# Altium PCB 球锁蓝牙20818.PcbDoc (part 1 of 3)
Units mm, origin at the board's own origin, x right, y up, seen from the top; angles counter-clockwise.
Board outline 49.43 x 48.4 mm, 2 copper layers (Top Layer, Bottom Layer); 90 components, 56 nets, 267 pads, 205 vias.
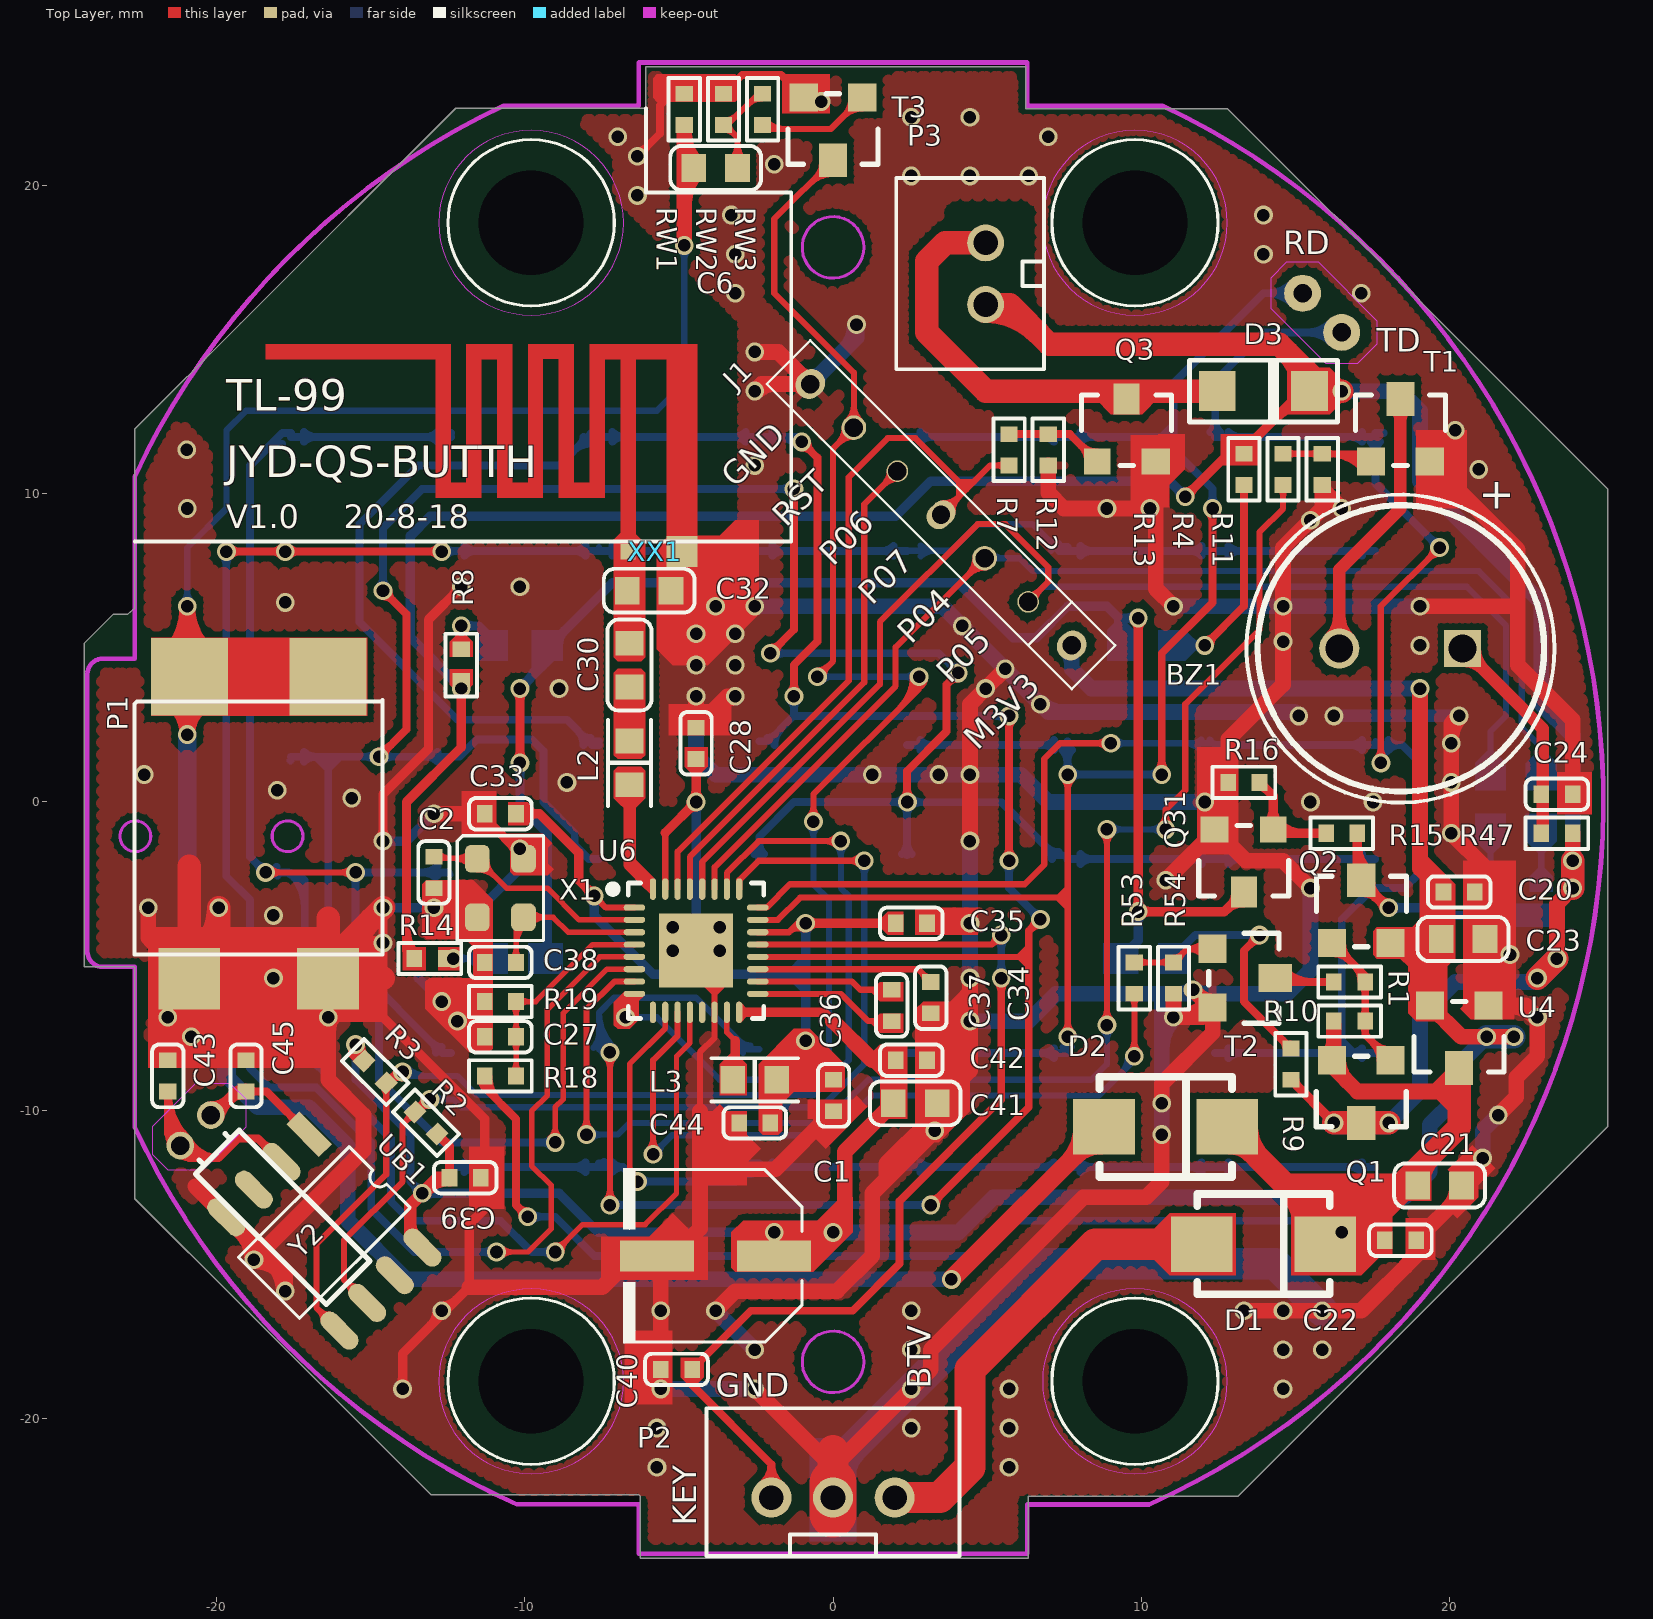
[diagram p0: Top Layer view]
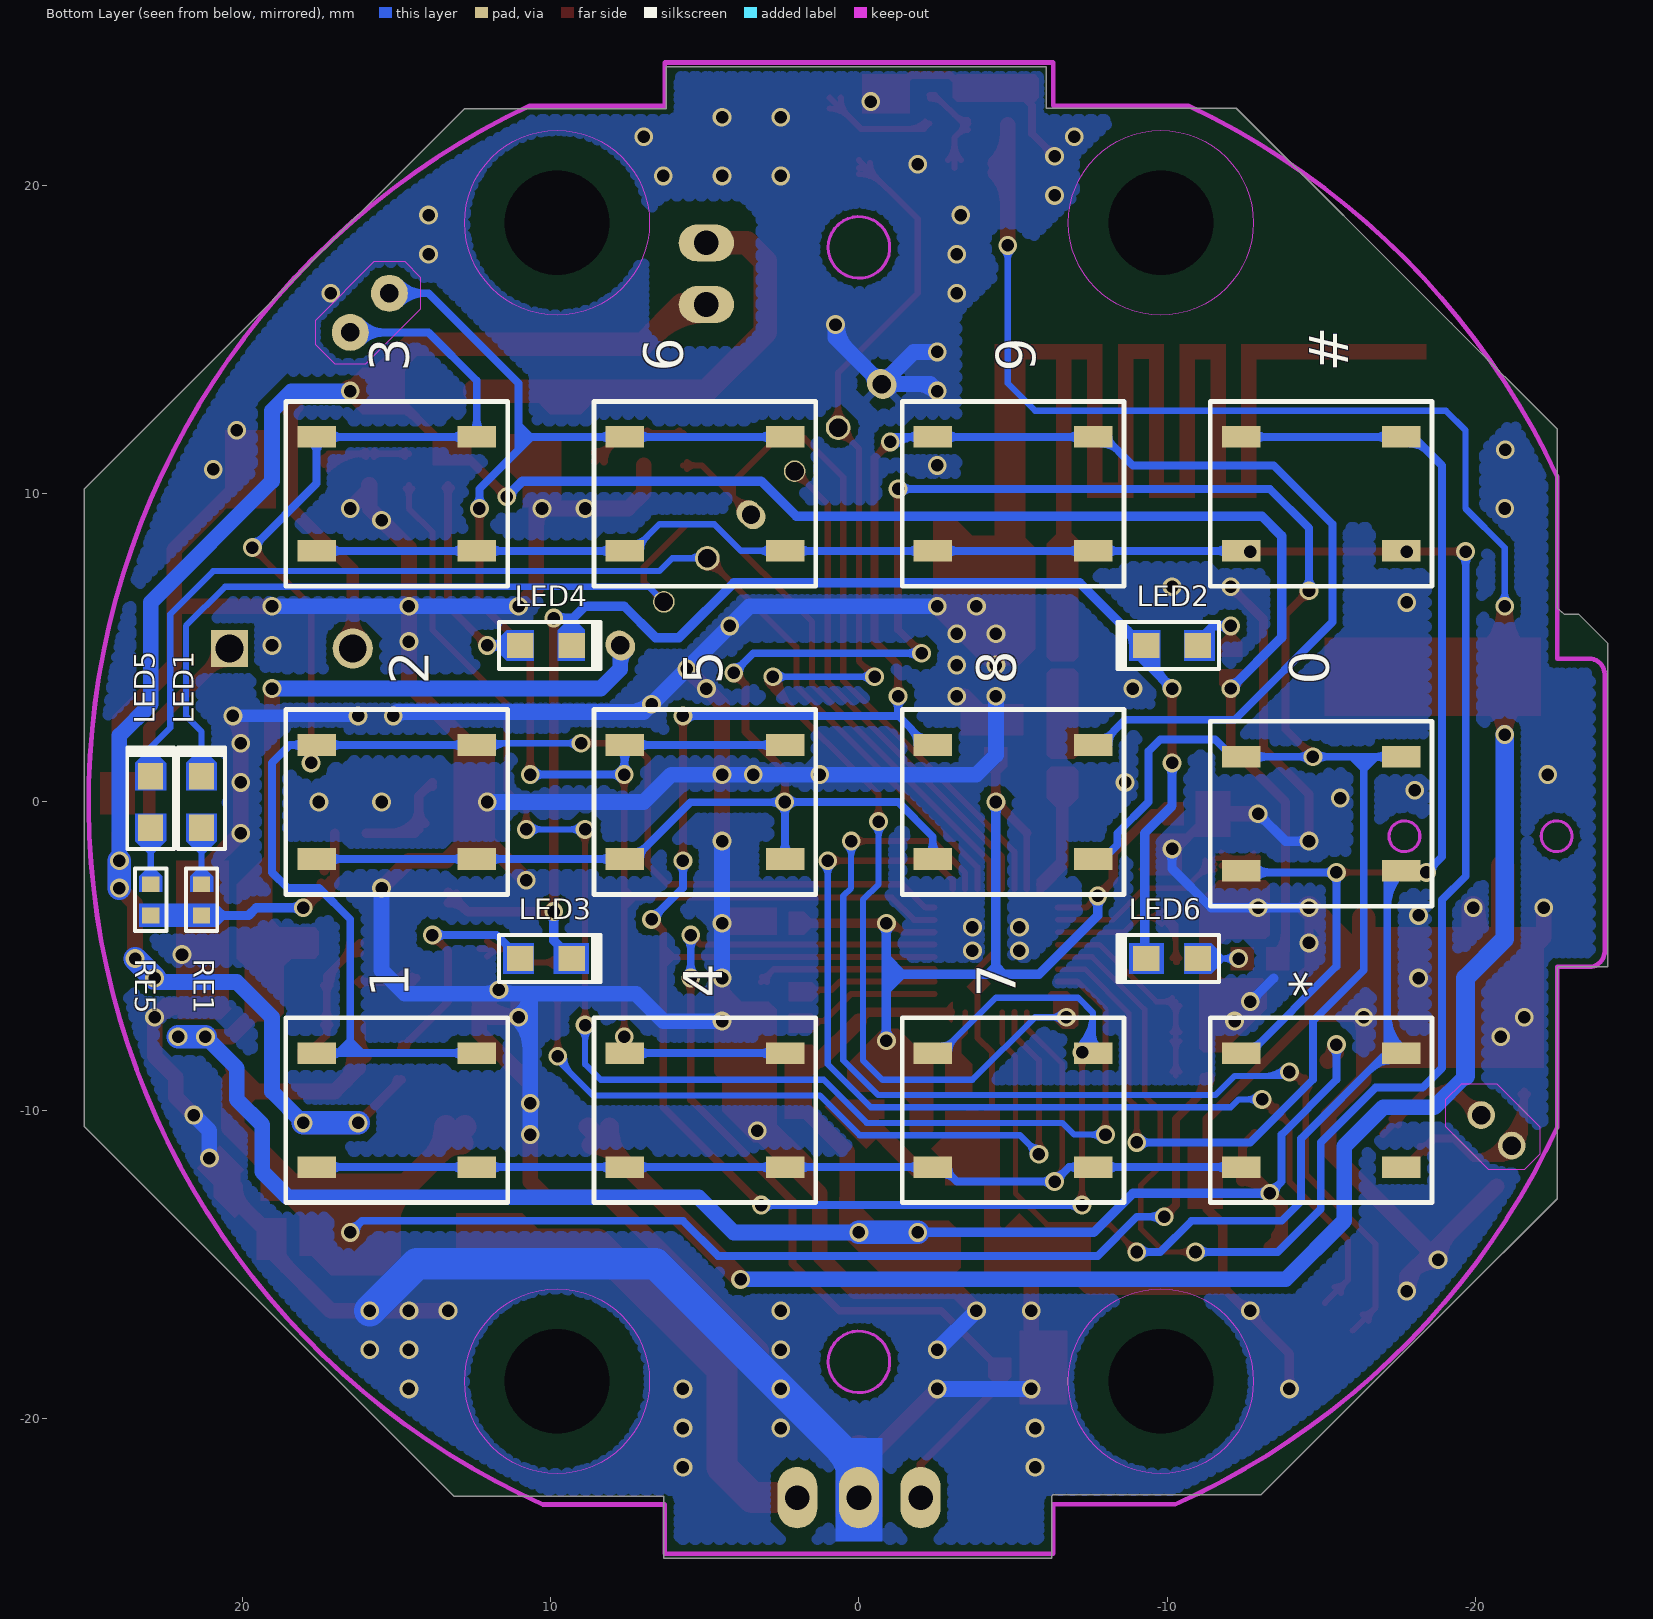
[diagram p1: Bottom Layer view, seen from below]
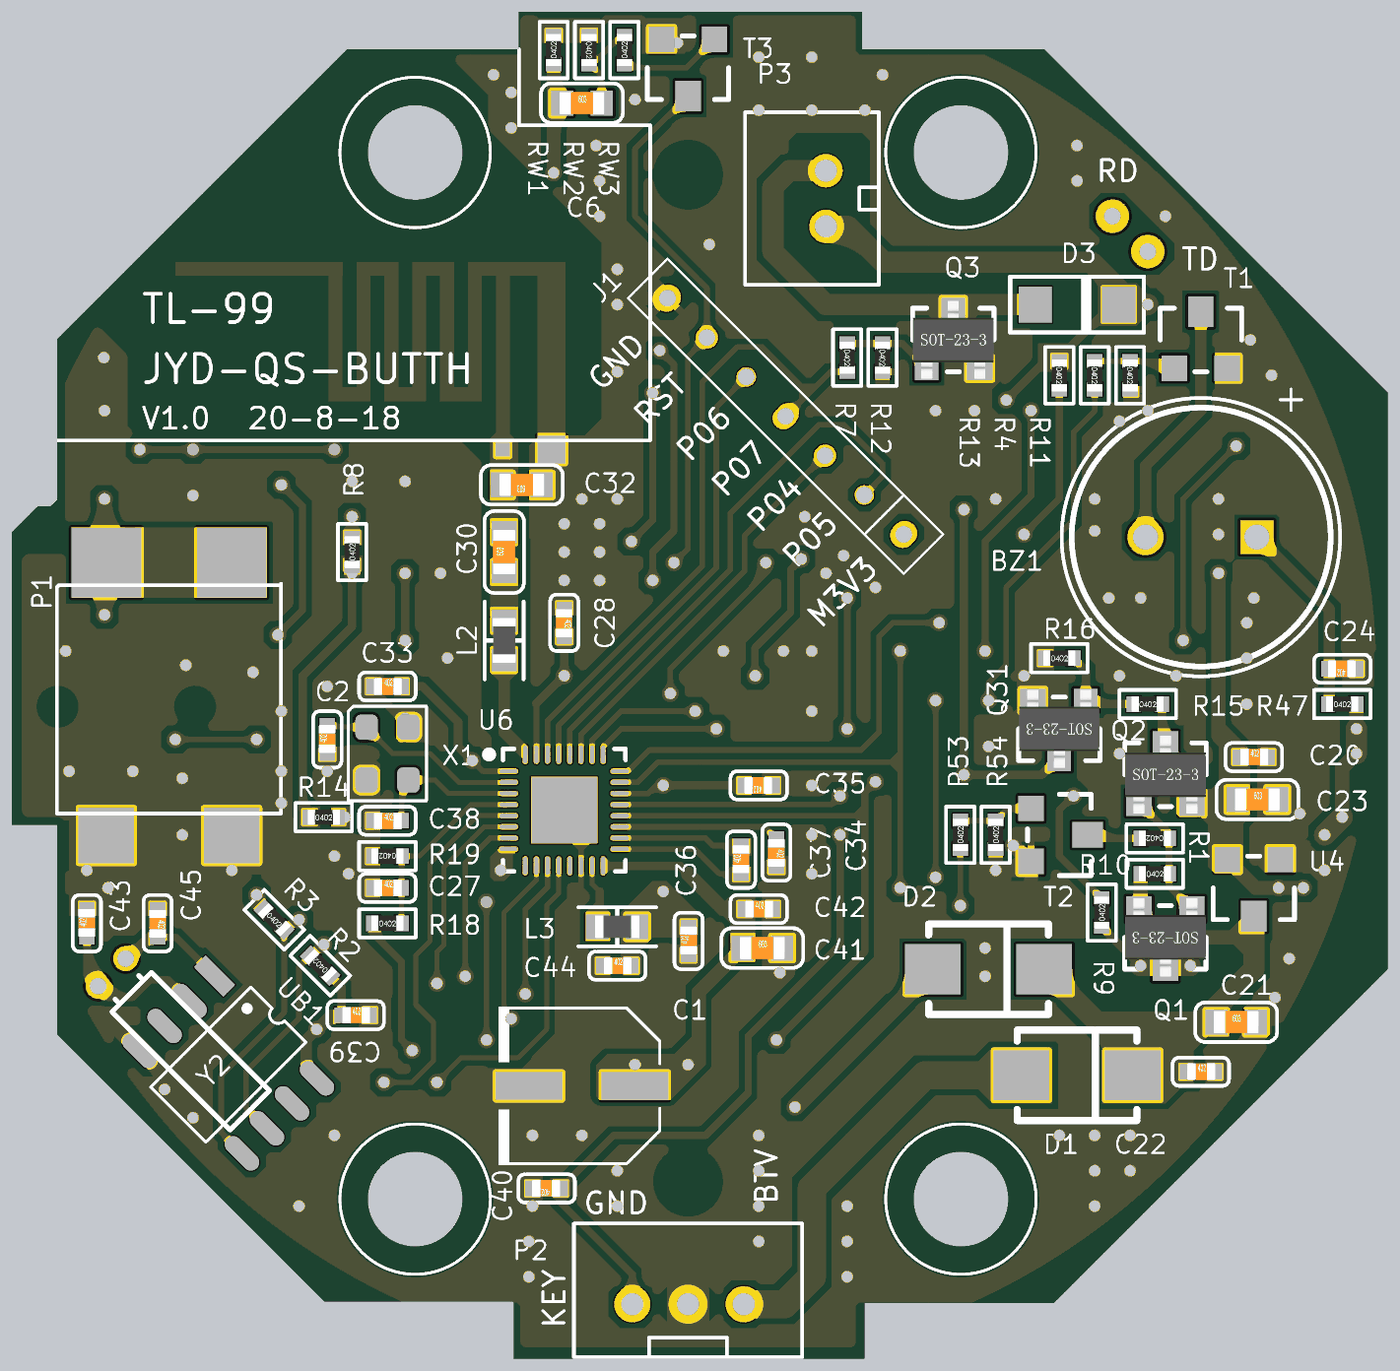
[diagram p4: 3D render of the assembled board from above, using the file's embedded part models]

## Layer stack, top to bottom
Top Layer: signal copper 0.0356
Dielectric: core 0.32, FR-4, Dk 4.8
Bottom Layer: signal copper 0.0356

## Board outline
-22.659,6.304 -22.659,9.913 -22.659,12.103 -19.23,15.531 -12.246,22.515 -10.41,22.515 -6.073,22.515 -6.073,23.86 6.247,23.86 6.247,22.504 10.214,22.504 12.796,22.504 19.37,15.931 25.135,10.165 25.135,-2.281 25.135,-10.54 17.24,-18.436 13.136,-22.54 6.337,-22.54 6.337,-24.54 -6.056,-24.54 -6.253,-24.54 -6.253,-22.53 -6.306,-22.477 -11.548,-22.477 -13.056,-22.477 -19.133,-16.4 -22.659,-12.874 -22.659,-10.79 -22.659,-5.369 -22.674,-5.354 -24.293,-5.354 -24.293,5.158 -23.644,5.807 -23.364,6.087 -22.896,6.087

## Design rules (kind name [scope] priority, off if disabled: settings)
Clearance Clearance_1 [(InPoly)Or(IsKeepOut) vs (InPoly)Or(IsKeepOut)] p1 off: gap=0.305
Clearance [All] p2: gap=0.2
ComponentClearance [All] p1: gap=0 collisioncheckmode=3 verticalgap=0 showdistances=FALSE
FabricationTestPointUsage TestPointUsage [All] p1: valid=0 allowmultiple=FALSE
FabricationTestpoint Testpoint [(IsPad And (OnTopLayer Or OnBottomLayer))] p1: side=3 testpointundercomponent=TRUE minsize=1.016 maxsize=2.54 preferedsize=1.524 minholesize=0 maxholesize=1.016 preferedholesize=0.813 testpointgrid=0.025 allowsidetop=TRUE allowsidebottom=TRUE usegrid=TRUE gridtolerance=0
HoleSize [All] p1: absolutevalues=TRUE maxlimit=25.4 minlimit=0.025 maxpercent=80.000 minpercent=20.000
HoleToHoleClearance [All] p1: gap=0 allowstackedmicrovias=TRUE
MinimumSolderMaskSliver [All] p1: minsoldermaskwidth=0
PolygonConnect PolygonConnect_1 [IsVia] p1: connectstyle=Direct reliefconductorwidth=0.254 reliefentries=4 polygonreliefangle="90 Angle" airgapwidth=0.254
PolygonConnect [All] p2: connectstyle=Relief reliefconductorwidth=0.254 reliefentries=4 polygonreliefangle="90 Angle" airgapwidth=0.254
RoutingVias [All] p1: holewidth=0.4 width=0.6 viastyle="Through Hole" minholewidth=0.4 minwidth=0.6 maxholewidth=0.4 maxwidth=0.6
SilkToSilkClearance [All] p1: silktosilkclearance=0
SilkToSolderMaskClearance SilkscreenOverComponentPads [IsPad] p1: minsilkscreentomaskgap=0 clearancetoexposedcopper=TRUE
SolderMaskExpansion [All] p1: expansion=0.102
Width [All] p1: maxlimit=2.032 minlimit=0.152 preferedwidth=0.254
20 further rules are at their usual default settings.

## Components (designator, comment, footprint, x,y, rotation, side; value= is the part's Value field where it differs from the comment)
0 "SW" KEY_5.2*3.7*6.4 -15,-0.381 r180 bottom
1 "SW" KEY_5.2*3.7*6.4 15,-10 r0 bottom
2 "SW" KEY_5.2*3.7*6.4 15,0 r0 bottom
3 "SW" KEY_5.2*3.7*6.4 15,10 r0 bottom
4 "SW" KEY_5.2*3.7*6.4 5,-10 r0 bottom
5 "SW" KEY_5.2*3.7*6.4 5,0 r0 bottom
6 "SW" KEY_5.2*3.7*6.4 5,10 r0 bottom
7 "SW" KEY_5.2*3.7*6.4 -5,-10 r0 bottom
8 "SW" KEY_5.2*3.7*6.4 -5,0 r0 bottom
9 "SW" KEY_5.2*3.7*6.4 -5,10 r0 bottom
# "SW" KEY_5.2*3.7*6.4 -15,10 r0 bottom
* "SW" KEY_5.2*3.7*6.4 -15,-10 r0 bottom
BZ1 "BUZZER" BUZZER_D93_L40 18.43,4.984 r180 top locked
C1 "220uF/6.3V" R5*5.8 -3.81,-14.732 r180 top
C2 "12pF" 0402C -12.954,-2.286 r90 top
C6 "10uF/10V" 0603C -3.81,20.574 r0 top (schematic designator C?)
C20 "0.1uF" 0402C 20.32,-2.921 r0 top
C21 "22uF/10V" 0603C 19.685,-12.446 r0 top
C22 "0.1uF" 0402C 18.415,-14.224 r0 top
C23 "10uF/10V" 0603C 20.447,-4.445 r0 top
C24 "10uF/10V" 0402C 23.495,0.254 r180 top
C27 "1nF" 0402C -10.795,-7.62 r0 top
C28 "1uF/6.3V" 0402C -4.445,1.905 r270 top
C30 "1.5pF" 0603C -6.604,4.445 r90 top
C32 "1pF" 0603C -5.969,6.858 r180 top
C33 "0.1uF" 0402C -10.795,-0.381 r0 top
C34 "0.1uF" 0402C 3.175,-6.35 r270 top
C35 "1uF" 0402C 2.54,-3.937 r180 top
C36 "0.1uF" 0402C 0.019,-9.525 r90 top
C37 "0.1uF" 0402C 1.905,-6.604 r90 top
C38 "12pF" 0402C -10.795,-5.207 r0 top
C39 "0.1uF" 0402C -11.938,-12.192 r0 top
C40 "1nF" 0402C -5.08,-18.415 r180 top
C41 "10uF/6.3V" 0603C 2.667,-9.779 r0 top
C42 "0.1uF" 0402C 2.54,-8.382 r0 top
C43 "22PF" 0402C -21.59,-8.89 r90 top (schematic designator C26)
C44 "10uF/6.3V" 0402C -2.54,-10.414 r0 top
C45 "22PF" 0402C -19.05,-8.89 r270 top (schematic designator C28)
D1 "SS14" DO-214AA 13.97,-14.351 r180 top
D2 "SS14" DO-214AA 10.795,-10.541 r180 top
D3 "IN4148" SOD-123 13.97,13.335 r0 top
J1 "7P" 7P-2.0MM 7.747,5.08 r135 top
L2 "2nH" 0603L -6.604,1.27 r270 top
L3 "2.2uH" 0603L -2.54,-9.017 r180 top
LED1 "GREEN" 0603LED 21.336,0 r90 bottom
LED2 "Blue" 0603LED -10.16,5.08 r0 bottom
LED3 "Blue" 0603LED 10.16,-5.08 r180 bottom
LED4 "Blue" 0603LED 10.16,5.08 r180 bottom
LED5 "Red" 0603LED 22.987,0 r90 bottom
LED6 "Blue" 0603LED -10.16,-5.08 r0 bottom
P1 "MICROUSB" yingjix -20.813,-5.634 r90 top
P2 "电池盒" B3B-PH 0,-22.575 r180 top
P3 "外接磁线圈" B2B-PH 4.953,17.145 r270 top
Q1 "SI2301" "SOT-23 - GDS" 17.145,-9.398 r180 top
Q2 "SI2301" "SOT-23 - GDS" 17.145,-3.556 r0 top
Q3 "S8050" "SOT-23 - BCE" 9.525,12.065 r0 top
Q31 "PMBT3904" "SOT-23 - BCE" 13.335,-1.905 r180 top
R1 "1K" 0402R 16.764,-5.842 r180 top
R2 "10K" 0402R -13.208,-10.414 r135 top (schematic designator R24)
R3 "10K" 0402R -14.859,-8.763 r315 top (schematic designator R25)
R4 "1K" 0402R 14.605,10.795 r270 top
R7 "1K" 0402R 5.715,11.43 r270 top
R8 "1k" 0402R -12.065,4.445 r90 top
R9 "1K" 0402R 14.859,-8.509 r90 top
R10 "100K" 0402R 16.764,-7.112 r0 top
R11 "10K" 0402R 15.875,10.795 r270 top
R12 "10K" 0402R 6.985,11.43 r270 top
R13 "1K" 0402R 13.335,10.795 r270 top
R14 "1K" 0402R -13.081,-5.08 r0 top
R15 "10K" 0402R 16.51,-1.016 r0 top
R16 "4.7K" 0402R 13.335,0.635 r0 top
R18 "500K%1" 0402R -10.795,-8.89 r0 top
R19 "100K%1" 0402R -10.795,-6.477 r180 top
R47 "10R" 0402R 23.495,-1.016 r0 top
R53 "1K" 0402R 9.779,-5.715 r90 top
R54 "10K" 0402R 11.049,-5.715 r90 top
RE1 "1K" 0402R 21.336,-3.175 r90 bottom
RE5 "1K" 0402R 22.987,-3.175 r90 bottom
RW1 "100K" 0402R -4.826,22.479 r90 top
RW2 "100K" 0402R -3.556,22.479 r270 top
RW3 "100R" 0402R -2.286,22.479 r90 top
T1 "SS8050" SOT-23-3L 18.415,12.065 r0 top
T2 "PMBT3904" SOT-23-3L 13.335,-5.715 r270 top
T3 "PMBT3904" SOT-23-3L 0,21.844 r180 top
U4 "HT7533" SOT-23-3L 20.32,-7.62 r180 top
U6 "BK3431Q" QFN32_4*4*0.4 -4.445,-4.826 r0 top
UB1 "PCF8563" SOP8 -16.51,-13.97 r315 top (schematic designator U5)
X1 "16MHZ" XTAL3225 -10.795,-2.794 r270 top
XX1 "TIANX" BT_NAMI_1 -6.655,7.366 r0 top
Y2 "32.768KHZ" 晶振-9 -20.193,-10.16 r225 top (schematic designator Y1)

## Footprints (in the part's own frame and the unit in brackets; to place one, negate y for a bottom-side part, rotate by r counter-clockwise, add the part's x,y. Pads: shape width x height; smd on the part's side, far side on the other; paste and mask are expansions set on the pad)
7P-2.0MM [mm]
  oval 0.9x1 hole 0.6 mask+0.05: 1(0,0) 7(12,0)
  round 0.7 hole 0.6 mask+0.05: 2(2,0) 5(8,0)
  round 0.8 hole 0.6 mask+0.05: 3(4,0) 6(10,0)
  oval 0.8x1 hole 0.6 mask+0.05: 4(6,0)
  silkscreen extent -1,-1 13,1
0402C [mil]
  rect 20x22 smd mask+2: 1(-20,0) 2(20,0)
  silkscreen extent -40,-20 40,20, body extent -19,-12 20,12, height 8
0402R [mil]
  rect 20x22 smd mask+2: 1(-20,0) 2(20,0)
  silkscreen extent -40,-20 40,20, body extent -23,-11 23,11, height 16
0603C [mm]
  rect 0.8x0.9 smd: 1(-0.711,0) 2(0.711,0)
  silkscreen extent -1.47,-0.71 1.47,0.71, body extent -0.8,-0.4 0.8,0.4, height 0.3
0603L [mm]
  rect 0.8x0.9 smd: 1(-0.711,0) 2(0.711,0)
  silkscreen extent -1.4,-0.7 1.4,0.7, body extent -0.82,-0.41 0.83,0.41, height 0.46
0603LED [mil]
  rect 34x32 smd: 1(-33,0) 2(33,0)
  silkscreen extent -60,-30 70,30, body extent -31,-16 31,16, height 24
B2B-PH [mm]
  round 1.2 / inner round 1.2 / far side oval 1.2x1.8 hole 0.8 mask+0.05: 1(-1,0) 2(1,0)
  silkscreen extent -3.1,-2.9 3.1,1.9
B3B-PH [mm]
  round 1.3 / inner round 1.3 / far side oval 1.3x2 hole 0.8 mask+0.05: 1(-2,0) 2(0,0) 3(2,0)
  silkscreen extent -4.1,-2.9 4.1,1.9
BT_NAMI_1 [mm]
  rect 0.5x0.5 smd: 1(0,0.762)
  rect 1x1 smd: 2(1.753,0.762)
  Top Layer region: -11.76,7 -5.75,7 -5.75,7.5 -11.76,7.5
  Top Layer region: -6.25,2.499 -5.75,2.499 -5.75,7.499 -6.25,7.499
  Top Layer region: -6.25,2.5 -4.75,2.5 -4.75,3 -6.25,3
  Top Layer region: -5.249,2.5 -4.749,2.5 -4.749,7.5 -5.249,7.5
  Top Layer region: -5.25,7 -3.75,7 -3.75,7.5 -5.25,7.5
  Top Layer region: -4.25,2.499 -3.75,2.499 -3.75,7.499 -4.25,7.499
  Top Layer region: -4.25,2.5 -2.75,2.5 -2.75,3 -4.25,3
  Top Layer region: -3.25,2.5 -2.75,2.5 -2.75,7.5 -3.25,7.5
  Top Layer region: 1.25,0.762 2.25,0.762 2.25,7.5 1.25,7.5
  Top Layer region: -0.247,0.762 0.253,0.762 0.253,7.5 -0.247,7.5
  Top Layer region: -1.25,7 2.25,7 2.25,7.5 -1.25,7.5
  Top Layer region: -1.25,2.504 -0.75,2.504 -0.75,7.504 -1.25,7.504
  Top Layer region: -2.25,2.5 -0.75,2.5 -0.75,3 -2.25,3
  Top Layer region: -2.25,2.5 -1.75,2.5 -1.75,7.5 -2.25,7.5
  Top Layer region: -3.25,7.004 -1.75,7.004 -1.75,7.504 -3.25,7.504
BUZZER_D93_L40 [mm]
  rect 1.2x1.2 hole 0.9: 1(-2,0)
  round 1.3 hole 0.9: 2(2,0)
  silkscreen extent -4.65,-4.65 4.65,4.65
DO-214AA [mm]
  rect 2x1.8 smd: 1(2,0) 2(-2,0)
  silkscreen extent -2.15,-1.63 2.15,1.63
KEY_5.2*3.7*6.4 [mm]
  rect 1.25x0.7 smd: 1(-2.6,1.85) 1(2.6,1.85) 2(-2.6,-1.85) 2(2.6,-1.85)
  silkscreen extent -3.6,-3 3.6,3
QFN32_4*4*0.4 [mm]
  rect 2.4x2.4 smd paste-0.025 mask+0.051: 0(0,0)
  oval 0.7x0.2 smd paste-0.025 mask+0.051: 1(-2,1.4) 2(-2,1) 3(-2,0.6) 4(-2,0.2) 5(-2,-0.2) 6(-2,-0.6) 7(-2,-1) 8(-2,-1.4) 17(2,-1.4) 18(2,-1) 19(2,-0.6) 20(2,-0.2) 21(2,0.2) 22(2,0.6) 23(2,1) 24(2,1.4)
  oval 0.2x0.7 smd paste-0.025 mask+0.051: 9(-1.4,-2) 10(-1,-2) 11(-0.6,-2) 12(-0.2,-2) 13(0.2,-2) 14(0.6,-2) 15(1,-2) 16(1.4,-2) 25(1.4,2) 26(1,2) 27(0.6,2) 28(0.2,2) 29(-0.2,2) 30(-0.6,2) 31(-1,2) 32(-1.4,2)
  silkscreen extent -2.82,-2.2 2.2,2.2
R5*5.8 [mm]
  rect 2.4x1 smd: 1(-1.9,0) 2(1.9,0)
  silkscreen extent -2.8,-2.85 3,2.85
SOD-123 [mm]
  rect 1.2x1.3 smd mask+0.05: 1(-1.5,0) 2(1.5,0)
  silkscreen extent -2.4,-1 2.4,1
SOP8 [mm]
  rect 1.5x0.6 smd mask+0.05: 1(-2.6,1.905)
  oval 1.5x0.6 smd mask+0.05: 2(-2.6,0.635) 3(-2.6,-0.635) 4(-2.6,-1.905) 5(2.6,-1.905) 6(2.6,-0.635) 7(2.6,0.635) 8(2.6,1.905)
  round 0.4 on Top Overlay mask+0.05: ""(-0.949,1.905)
  silkscreen extent -1.4,-2.54 1.4,2.54
"SOT-23 - BCE" [mm]
  rect 0.85x0.85 smd: B(-0.95,-1.016)
  rect 0.85x1 smd: C(0,1.016)
  rect 0.914x0.85 smd: E(0.95,-1.016)
  silkscreen extent -1.46,-1.14 1.46,1.14, body extent -1.45,-1.4 1.45,1.4, height 1.2
"SOT-23 - GDS" [mil]
  rect 36x43.31 smd: D(0,40)
  rect 36x36 smd: G(-37.4,-40) S(37.4,-40)
  silkscreen extent -57,-45 58,45, body extent -57,-55 57,55, height 47
SOT-23-3L [mil]
  rect 36x36 smd: 1(-37.4,-40) 2(37.4,-40)
  rect 36x43.31 smd: 3(0,40)
  silkscreen extent -57,-45 58,45
XTAL3225 [mm]
  rrect50% 0.9x0.8 smd: 1(-0.95,-0.75) 2(0.95,-0.75) 3(0.95,0.75) 4(-0.95,0.75)
  silkscreen extent -1.7,-1.4 1.7,1.4
yingjix [mm]
  rect 2x2 smd: 1(-0.102,0.076) 1(-0.102,-4.424)
  rect 2.5x2.5 smd: 2(9.698,-4.424) 2(9.698,0.076)
  silkscreen extent 0.69,-6.2 8.94,1.85
晶振-9 [mm]
  round 0.9 hole 0.6: 1(0,0) 2(1.4,0)
  rect 0x0 smd: 3(0.635,8)
  silkscreen extent -0.3,0.76 1.7,7

## Part data
0 1 2 3 4 5 6 7 8 9 # *: "Switch"
BZ1: "Buzzer"
C1 C21 C23: library part CAP-P, "Capacitor, tolerance ±20%"
C2 C28 C30 C32 C33 C34 C35 C36 C37 C38 C41 C42 C44: library part Cap, "Capacitor"
C6 C20 C22 C27: library part CAP-NP, "Capacitor, Ceramic"
C24: library part C_0_Dup1
C39 C40 C43 C45: library part C
D1 D2 D3: library part D
L2 L3: "Power Inductor, 4.7uH, 0.7A, 260mR DCR"
LED1 LED2 LED3 LED4 LED5 LED6: library part LED
P1: library part MHDR1X2, "Header, 2-Pin"
P2: library part "Header 3", "Header, 3-Pin"
P3: library part "Header 2", "Header, 2-Pin"
Q1 Q2: library part PWRMOSFET_EP_DGS_0
Q3: library part PMBT3904_Dup1
R1 R8 R9 R10 R13 R14 R15 R16 R53 R54 RE1 RE5 RW1 RW2 RW3: library part R
R2 R3 R7 R12: library part RES
R4 R11 R47: library part R_Dup1
R18 R19: library part Res2, "Resistor"
T1 T2 T3: library part NPN_BJT, "Bipolar Junction Transistor"
U4: library part XC6206P302M
UB1: library part IC8
Y2: library part 晶振

## Free pads (board coordinates)
  round 1.2 hole 0.6: 0(16.51,15.24) 1(15.24,16.51)
  round 0.254 hole 3.4 unplated: 1(-9.8,-18.8) 2(-9.8,18.8) 3(9.8,18.8) 4(9.8,-18.8)

## Via types
v1: diameter 0.61, hole 0.406, Top Layer to Bottom Layer, tented both sides, 204 vias
v2: diameter 0.6, hole 0.4, Top Layer to Bottom Layer, tented both sides, 1 vias

## Nets (pads, with @x,y where several pads share a name; then routed paths per layer and width w, separated by ;. In a path a pad name is that pad's centre, name@x,y a point inside that pad or via, vN(x,y) a via of type N, cw(c..) or ccw(c..) an arc to the next point about the centre after c; other vN are vias at no path point)
BAT_ADC: C27.2 R18.2 R19.1 U6.4 | length 10.2
  Top Layer w0.178: R18.2@-10.404,-8.748 ccw(c-10.686,-8.466) -10.287,-8.466 ccw(c-9.888,-8.466) R18.2@-10.17,-8.748 ; C27.2@-10.404,-7.762 cw(c-10.686,-8.044) -10.287,-8.044 cw(c-9.888,-8.044) C27.2@-10.17,-7.762 ; C27.2@-10.404,-7.478 ccw(c-10.686,-7.196) -10.287,-7.196 ccw(c-9.888,-7.196) C27.2@-10.17,-7.478 ; R19.1@-10.404,-6.619 cw(c-10.686,-6.901) -10.287,-6.901 cw(c-9.888,-6.901) R19.1@-10.17,-6.619 ; R18.2@-10.287,-8.89 R19.1@-10.287,-6.477 -9.652,-6.477 -7.801,-4.626 U6.4@-6.445,-4.626 ; R19.1@-10.17,-6.594 cw(c-9.888,-6.876) -9.888,-6.477 cw(c-9.888,-6.078) R19.1@-10.17,-6.36
BEEP: R4.2 U6.7 | length 52.9
  Top Layer w0.2: v1@-8.146,-10.65 ccw(c-8.495,-10.301) -8.001,-10.301 ccw(c-7.507,-10.301) v1@-7.856,-10.65 ; v1(-8.001,-10.795) -8.001,-6.731 -7.096,-5.826 U6.7@-6.445,-5.826 ; v1@8.745,-7.094 ccw(c8.396,-6.745) 8.89,-6.745 ccw(c9.384,-6.745) v1@9.035,-7.094 ; v1@8.745,-1.034 cw(c8.396,-1.383) 8.89,-1.383 cw(c9.384,-1.383) v1@9.035,-1.034 ; v1(8.89,-7.239) v1(8.89,-0.889) ; v1@10.65,-0.744 ccw(c10.301,-0.395) 10.795,-0.395 ccw(c11.289,-0.395) v1@10.94,-0.744 ; v1(10.795,-0.889) 10.795,-0.254 11.43,0.381 11.43,3.175 13.843,5.588 13.843,8.763 14.605,9.525 R4.2@14.605,10.287 ; R4.2@14.496,10.178 cw(c14.233,9.915) 14.605,9.915 cw(c14.977,9.915) R4.2@14.714,10.178
  Bottom Layer w0.2: v1(-8.001,-10.795) -6.985,-10.795 -6.604,-10.414 -0.254,-10.414 1.143,-9.017 8.382,-9.017 8.89,-8.509 v1(8.89,-7.239) ; v1@-7.856,-10.94 cw(c-7.507,-11.289) -7.507,-10.795 cw(c-7.507,-10.301) v1@-7.856,-10.65 ; v1@8.745,-7.384 cw(c8.396,-7.733) 8.89,-7.733 cw(c9.384,-7.733) v1@9.035,-7.384 ; v1(8.89,-0.889) v1(10.795,-0.889) ; v1@9.035,-1.034 cw(c9.384,-1.383) 9.384,-0.889 cw(c9.384,-0.395) v1@9.035,-0.744 ; v1@10.65,-1.034 ccw(c10.301,-1.383) 10.301,-0.889 ccw(c10.301,-0.395) v1@10.65,-0.744
GND: C1.2 C2.1 C20.2 C21.2 C22.2 C23.2 C24.1 C27.1 C28.1 C30.2 C32.1 C32.2 C33.1 C34.2 C35.1 C36.1 C38.1 C39.2 C40.2 C41.2 C42.2 C43.2 C44.1 C45.1 J1.7 P1.1 P2.2 Q3.E Q31.E R11.2 R12.2 R16.1 R19.2 R54.1 RW1.2 RW2.1 T1.2 T2.2 T3.2 U4.1 U6.0 U6.14 UB1.4 X1.2 X1.4 XX1.1 XX1.2 | length 510.3
  Top Layer w0.2: U6.0@-4.445,-4.826 -3.845,-5.426 U6.14@-3.845,-6.826 -3.845,-7.655 -4.318,-8.128 -4.318,-10.033
  Top Layer w0.254: -16.383,-8.255 -16.389,-8.249 -16.383,-8.242 ; v1(-6.35,20.955) -5.619,21.686 -5.619,22.606 -5.258,22.967 RW2.1@-3.556,22.967 ; v1@-6.35,21.133 ccw(c-6.35,21.562) -6.046,21.259 ccw(c-5.743,20.955) v1@-6.172,20.955 ; -5.206,22.967 ccw(c-5.206,23.341) RW1.2@-4.941,23.077 ; -5.11,22.967 cw(c-5.11,22.728) RW1.2@-4.941,22.897 ; RW1.2@-4.711,22.897 cw(c-4.542,22.728) -4.542,22.967 ; RW1.2@-4.711,23.077 ccw(c-4.446,23.341) -4.446,22.967 ; -3.936,22.967 ccw(c-3.936,23.341) RW2.1@-3.671,23.077 ; -3.84,22.967 cw(c-3.84,22.728) RW2.1@-3.671,22.897 ; RW2.1@-3.556,22.987 -2.945,23.598 -1.688,23.598 T3.2@-0.95,22.86 ; RW2.1@-3.531,23.114 ccw(c-3.531,23.359) RW2.1@-3.357,23.186 ; RW2.1@-3.404,22.987 cw(c-3.036,22.987) -3.296,23.247 ; T3.2@-1.28,22.86 ccw(c-2.077,22.86) -1.514,23.424 ccw(c-0.95,23.987) T3.2@-0.95,23.19
  Top Layer w0.305: P1.1@-16.389,-5.735 -16.369,-5.715 -14.605,-5.715 ; P1.1@-15.975,-5.385 ccw(c-15.262,-4.781) -15.262,-5.715 ; P1.1@-15.963,-6.07 cw(c-15.232,-6.644) -15.232,-5.715 ; P1.1@-15.743,-5.188 ccw(c-14.605,-4.225) -14.605,-5.715 ; P1.1@-15.723,-6.259 cw(c-14.605,-7.136) -14.605,-5.715 ; -14.737,-5.791 ccw(c-15.056,-5.975) -14.96,-5.62 ccw(c-14.865,-5.264) -14.681,-5.583 ; -14.737,-5.639 cw(c-15.056,-5.455) -14.96,-5.81 cw(c-14.865,-6.166) -14.681,-5.847 ; v1@-14.713,-3.537 cw(c-14.973,-3.797) -14.605,-3.797 cw(c-14.237,-3.797) v1@-14.497,-3.537 ; v1@-14.713,-1.162 ccw(c-14.973,-0.902) -14.605,-0.902 ccw(c-14.237,-0.902) v1@-14.497,-1.162 ; v1(-14.605,-3.429) -14.605,-5.715 ; v1(-14.605,-1.27) -14.605,0.254 -13.13,1.729 -13.13,5.92 v1(-12.065,6.985) ; -14.497,-5.823 ccw(c-14.237,-6.083) -14.605,-6.083 ccw(c-14.973,-6.083) -14.713,-5.823 ccw(c-14.973,-6.083) -14.973,-5.715 ccw(c-14.973,-5.347) -14.713,-5.607 ccw(c-14.973,-5.347) -14.605,-5.347 ccw(c-14.237,-5.347) -14.497,-5.607 ; v1@-14.078,-18.942 ccw(c-14.338,-18.682) -13.97,-18.682 ccw(c-13.602,-18.682) v1@-13.862,-18.942 ; v1(-13.97,-19.05) -13.97,-17.907 -11.811,-15.748 -11.811,-13.716 -11.303,-13.208 -11.303,-10.287 -14.605,-6.985 -14.605,-5.715 ; v1@-13.062,-3.537 ccw(c-12.561,-3.036) -12.561,-3.744 ; v1@-13.062,-3.321 ccw(c-13.322,-3.061) -12.954,-3.061 ccw(c-12.586,-3.061) -12.846,-3.321 ccw(c-11.826,-2.301) X1.2@-11.826,-3.744 ; -13.05,-16.987 ccw(c-13.527,-16.51) v1@-12.852,-16.51 ; v1@-12.954,-3.581 cw(c-12.954,-3.949) -12.694,-3.689 cw(c-12.434,-3.429) v1@-12.802,-3.429 ; C2.1@-12.954,-2.794 v1(-12.954,-3.429) -12.639,-3.744 X1.2@-11.545,-3.744 ; v1@-12.7,-16.358 ccw(c-12.7,-15.683) -12.223,-16.16 ; v1(-12.7,-6.477) R19.2@-11.303,-6.477 ; v1@-12.592,-6.585 cw(c-12.332,-6.845) -12.332,-6.477 cw(c-12.332,-6.109) v1@-12.592,-6.369 ; v1@-12.217,6.985 cw(c-12.585,6.985) -12.325,6.725 cw(c-12.065,6.465) v1@-12.065,6.833 ; X1.2@-11.72,-3.919 ccw(c-12.143,-4.342) -12.143,-3.744 ccw(c-12.143,-3.146) X1.2@-11.72,-3.569 ; C39.2@-11.502,-12.289 cw(c-11.982,-12.769) -11.303,-12.769 ; C39.2@-11.502,-12.095 ccw(c-11.982,-11.615) -11.303,-11.615 ; C27.1@-11.303,-7.62 R19.2@-11.303,-6.477 ; C38.1@-11.303,-5.207 R19.2@-11.303,-6.477 ; C33.1@-11.303,-0.381 -11.303,-0.508 -10.045,-1.766 X1.4@-10.045,-1.844 ; C33.1@-11.201,-0.406 ccw(c-10.711,-0.406) -11.058,-0.753 ; -10.637,-1.174 ccw(c-10.16,-0.697) v1@-10.16,-1.372 ; -10.487,-1.324 cw(c-10.958,-1.794) X1.4@-10.293,-1.794 ; v1@-10.42,-1.391 ccw(c-10.045,-1.016) X1.4@-10.045,-1.546 ; X1.4@-10.196,-1.672 cw(c-10.242,-1.864) X1.4@-10.045,-1.864 ; C32.1@-5.258,6.858 -4.902,6.858 -4.318,6.858 v1(-3.81,6.35) ; C32.1@-5.083,6.683 cw(c-4.66,6.26) -4.66,6.858 cw(c-4.66,7.456) C32.1@-5.083,7.033 ; v1@-3.962,6.35 ccw(c-4.33,6.35) -4.07,6.61 ccw(c-3.81,6.87) v1@-3.81,6.502
  Top Layer w0.508: v1(-22.225,-3.429) -22.225,-4.4 P1.1@-20.889,-5.735 -21.59,-6.436 C43.2@-21.59,-8.382 C45.1@-19.05,-8.382 ; P1.1@-21.635,-5.735 ccw(c-23.437,-5.735) -22.163,-4.462 ccw(c-20.889,-3.188) P1.1@-20.889,-4.989 ; v1@-21.628,-7.019 cw(c-22.274,-7.605) -21.427,-7.815 ; v1@-21.593,-6.934 ccw(c-21.68,-5.4) P1.1@-20.533,-6.423 ; -21.59,-7.512 cw(c-19.678,-7.512) P1.1@-20.755,-5.932 ; P1.1@-21.59,-6.55 cw(c-20.334,-6.55) P1.1@-21.042,-5.512 ; v1@-21.539,-6.985 cw(c-20.091,-6.985) P1.1@-21.115,-5.961 ; -20.701,-12.473 UB1.4@-19.696,-13.479 -18.556,-14.619 ; UB1.4@-19.223,-13.951 cw(c-20.13,-14.859) v1@-18.847,-14.859 ; -19.05,-5.735 C45.1@-19.05,-8.382 ; v1@-18.796,-14.91 cw(c-18.796,-16.193) -17.888,-15.286 ; v1(-18.796,-14.859) -18.556,-14.619 ; -18.207,-14.967 cw(c-19.114,-15.875) v1@-17.831,-15.875 ; v1(-17.78,-15.875) -17.78,-15.394 -18.556,-14.619 ; P1.1@-16.917,-6.263 cw(c-18.206,-7.552) -16.383,-7.552 ; P1.1@-16.738,-6.395 cw(c-17.051,-6.985) v1(-16.383,-6.985) ; -16.606,-6.767 ccw(c-16.284,-6.568) v1@-16.371,-6.936 ; -16.383,-8.509 -16.51,-8.382 C45.1@-19.05,-8.382 ; -16.383,-7.521 cw(c-14.604,-7.521) P1.1@-15.862,-6.263 ; P1.1@-16.03,-6.389 ccw(c-15.703,-6.985) v1(-16.383,-6.985) ; v1(-12.954,-0.381) C33.1@-11.303,-0.381 ; -11.811,-15.748 -7.493,-15.748 -6.35,-14.605 C1.2@-5.66,-14.605 ; -6.944,-15.199 cw(c-6.41,-15.734) C1.2@-6.41,-14.978 ; C1.2@-5.884,-14.906 cw(c-6.598,-15.62) -5.588,-15.62 ; v1(-5.588,-19.05) C40.2@-5.588,-18.415 v1(-5.588,-16.51) -5.588,-14.677 C1.2@-5.66,-14.605 ; C32.1@-5.361,7.011 ccw(c-6.469,8.119) XX1.2@-4.902,8.119 ; -5.08,5.461 -3.81,5.461 ; XX1.2@-5.076,7.954 cw(c-5.496,7.534) -4.902,7.534 cw(c-4.308,7.534) XX1.2@-4.728,7.954 ; C32.1@-4.902,6.858 XX1.2@-4.902,8.128 ; C1.2@-4.764,-14.732 cw(c-3.694,-14.732) -4.451,-13.976 ; v1(-4.445,3.429) C28.1@-4.445,2.413 -3.429,3.429 v1(-3.175,3.429) ; -4.318,-10.033 -4.318,-10.414 ; v1(-3.81,-16.51) -3.175,-15.875 0.127,-15.875 1.27,-14.732 1.27,-12.7 1.726,-12.244 ; -3.695,3.163 cw(c-3.175,2.642) v1@-3.175,3.378 ; v1(-2.54,-19.05) 0,-21.59 ; v1(-2.54,13.335) -2.31,13.565 J1.7@-0.738,13.565 -1.778,14.605 v1(-2.54,14.605) ; v1@-2.504,13.299 cw(c-1.861,12.656) -1.861,13.565 ; -1.332,13.565 cw(c-1.332,12.971) J1.7@-0.912,13.391 ; J1.7@-0.934,13.565 ccw(c-1.407,13.565) -1.073,13.9 ccw(c-0.738,14.234) J1.7@-0.738,13.761 ; T3.2@-0.81,22.86 cw(c-0.81,22.304) v1@-0.417,22.697 ; T3.2@-0.774,22.961 ccw(c-0.381,23.185) v1(-0.381,22.733) ; v1@-0.405,22.778 cw(c-0.622,23.188) T3.2@-0.95,22.86 ; P2.2@-0.28,-22.295 ccw(c-0.956,-21.619) 0,-21.619 ccw(c0.956,-21.619) P2.2@0.28,-22.295 ; P2.2@0,-22.575 0,-21.59 ; C36.1@0.019,-10.033 -1.862,-11.914 -3.048,-11.914 C44.1@-3.048,-10.414 -4.318,-10.414 ; 2.348,-11.114 cw(c3.302,-12.068) v1@3.302,-10.719 ; 2.949,-10.513 ccw(c2.265,-9.829) C41.2@3.232,-9.829 ; v1@3.048,-10.501 cw(c3.614,-10.501) C41.2@3.427,-9.967 ; C41.2@3.048,-9.932 ccw(c4.038,-9.932) 3.338,-10.632 cw(c3.731,-10.239) 3.175,-10.239 ; C42.2@3.048,-8.579 ccw(c4.528,-8.579) 3.481,-9.626 cw(c4.221,-8.886) 3.175,-8.886 ; C42.2@3.048,-8.407 cw(c2.741,-8.714) 3.175,-8.714 ; C42.2@3.048,-8.357 ccw(c2.741,-8.05) 3.175,-8.05 ; C35.1@3.048,-3.937 v1(4.445,-3.937) ; v1@3.175,-10.569 cw(c3.989,-10.569) C41.2@3.471,-9.942 ; v1@3.342,-10.637 cw(c3.675,-10.381) C41.2@3.378,-10.084 ; 3.378,-10.361 cw(c2.995,-10.361) 3.266,-10.632 v1@3.175,-10.541 ; C41.2@3.378,-9.583 ccw(c3.378,-9.11) C41.2@3.713,-9.444 ; 3.709,-6.858 cw(c3.709,-7.848) v1@4.409,-7.148 ; v1(4.445,-5.715) v1@4.445,-6.858 ; v1(4.445,-1.27) v1(4.445,0.889) 4.445,3.175 v1(4.953,3.683) v1(5.588,4.318) ; R12.2@6.985,10.922 6.985,10.033 7.493,9.525 v1(8.89,9.525) v1(10.287,9.525) ; v1@10.251,9.489 cw(c9.71,8.948) 10.475,8.948 ; v1@10.251,9.561 ccw(c9.71,10.102) 10.475,10.102 ; Q3.E@10.541,10.983 Q3.E@10.475,11.049 10.475,6.924 v1(11.049,6.35) ; v1(10.668,-10.795) 10.668,-12.319 10.16,-12.827 8.128,-12.827 3.175,-17.78 3.175,-18.415 v1(2.54,-19.05) 0,-21.59 ; v1(10.668,-9.779) 10.668,-9.144 12.319,-7.493 T2.2@12.319,-6.665 ; v1(10.795,-2.54) 12.385,-0.95 Q31.E@12.385,-0.889 ; R54.1@11.049,-6.223 v1(11.049,-6.985) 11.999,-6.985 T2.2@12.319,-6.665 ; v1@11.056,-6.985 ccw(c11.056,-5.402) T2.2@12.175,-6.521 ; v1(11.684,-6.096) 12.253,-6.665 T2.2@12.319,-6.665 ; v1@11.859,-6.271 ccw(c12.319,-5.812) T2.2@12.319,-6.462 ; 11.995,-1.34 ccw(c11.544,-0.889) Q31.E@12.182,-0.889 ; v1@12.029,-0.036 cw(c11.17,-0.895) Q31.E@12.385,-0.895 ; Q31.E@12.199,-0.813 ccw(c11.565,-0.501) v1(12.065,0) 12.385,-0.32 ; Q31.E@12.353,-0.889 Q31.E@12.385,-0.889 ; 12.385,-0.42 cw(c13.804,-0.42) 12.827,0.61 ccw(c13.023,0.002) 12.385,0.002 ; Q31.E@12.588,-0.889 ccw(c13.079,-0.889) Q31.E@12.732,-1.236 ; v1(13.335,-16.51) v1(14.605,-16.51) v1(15.875,-16.51) 17.145,-16.51 18.923,-14.732 C22.2@18.923,-14.224 20.396,-12.751 C21.2@20.396,-12.446 20.396,-12.243 v1(21.082,-11.557) ; v1(15.494,-2.794) 14.605,-1.905 13.401,-1.905 Q31.E@12.385,-0.889 ; R11.2@15.875,10.287 R11.2@15.875,10.16 ; R11.2@15.9,10.287 ccw(c16.268,10.287) 16.008,10.027 ; v1(16.51,9.525) R11.2@15.875,10.16 ; 18.582,-15.073 ccw(c17.758,-14.249) C22.2@18.923,-14.249 ; v1(19.05,6.35) 22.225,6.35 ; T1.2@19.365,10.846 cw(c19.365,10.355) 19.712,10.702 cw(c20.059,11.049) T1.2@19.568,11.049 ; T1.2@19.365,11.049 22.225,8.189 22.225,6.35 ; 19.967,-13.18 ccw(c19.283,-12.496) C21.2@20.25,-12.496 ; v1@20.066,2.058 cw(c21.056,2.058) v1@20.356,2.758 ; 20.066,2.435 cw(c20.379,2.435) v1@20.328,2.744 ; v1(20.32,2.794) 20.066,2.54 v1(20.066,1.905) v1(20.066,-1.016) 21.158,-2.108 ; C21.2@20.542,-12.396 cw(c21.265,-12.396) 20.754,-11.885 ; C20.2@20.828,-2.946 cw(c20.031,-3.744) 21.158,-3.744 ; C20.2@20.828,-2.896 ccw(c20.054,-2.108) 21.158,-2.108 ; 21.158,-5.843 ccw(c22.031,-5.843) 21.414,-6.46 ccw(c21.761,-6.113) 21.761,-6.604 ccw(c21.761,-7.095) U4.1@21.414,-6.748 ; C23.2@21.165,-4.641 cw(c21.215,-5.709) v1(21.971,-4.953) 21.463,-4.445 C23.2@21.158,-4.445 ; v1(21.59,-10.16) 22.176,-9.574 22.176,-8.939 22.86,-8.255 v1(22.86,-6.985) 22.479,-6.604 U4.1@21.27,-6.604 21.158,-6.492 C23.2@21.158,-4.445 ; 21.818,-6.604 cw(c21.818,-8.027) v1@22.824,-7.021 ; C24.1@24.003,0.254 24.003,2.667 22.225,4.445 22.225,6.35 ; -18.556,-14.619 -15.24,-11.303 -15.24,-10.16 -16.383,-9.017 -16.383,-8.255 -16.383,-8.242 v1(-16.383,-6.985) ; C1.2@-5.66,-14.605 -5.08,-14.605 -4.318,-13.843 -4.318,-10.414 ; T3.2@-0.95,22.86 -0.823,22.733 v1(-0.381,22.733) ; T3.2@-0.95,22.86 -0.508,22.86 v1(-0.381,22.733) ; 1.726,-12.244 1.726,-11.736 3.048,-10.414 ; 1.726,-12.244 v1(3.302,-10.668) 3.378,-10.592 C41.2@3.378,-10.084 ; 3.048,-10.414 ccw(c2.582,-9.948) 3.234,-9.851 cw(c2.582,-9.948) 3.048,-10.414 ; 3.048,-10.414 v1@3.175,-10.541 ; 3.048,-10.414 3.175,-10.287 ; 3.048,-10.414 C42.2@3.048,-8.382 C42.2@3.175,-8.382 ; v1@3.175,-10.541 3.175,-10.287 ; 3.175,-10.287 ccw(c2.926,-10.038) 3.246,-9.89 cw(c2.926,-10.038) 3.175,-10.287 ; 3.175,-10.287 ccw(c3.621,-10.287) 3.335,-10.629 cw(c3.621,-10.287) 3.175,-10.287 ; 3.175,-10.287 C42.2@3.175,-8.382 ; 3.175,-10.287 C41.2@3.378,-10.084 ; C42.2@3.175,-8.382 4.445,-8.382 ; C42.2@3.175,-8.382 C34.2@3.175,-6.858 v1@4.445,-6.858 ; C41.2@3.378,-10.084 C41.2@3.378,-9.779 4.445,-8.712 4.445,-8.382 ; 4.445,-8.382 v1(4.445,-7.112) v1@4.445,-6.858 ; Q31.E@12.385,-0.889 12.385,-0.32 ; 12.385,-0.32 12.385,0.193 R16.1@12.827,0.635 12.827,2.032 14.605,3.81 v1(14.605,5.207) v1(14.605,6.35) 14.605,8.255 15.875,9.525 R11.2@15.875,10.16 ; C23.2@21.158,-4.445 21.158,-2.108 ; 3.175,-10.33 cw(c3.563,-10.33) 3.429,-9.966 ccw(c3.563,-10.33) 3.175,-10.33 ; v1@12.055,-0.05 cw(c11.974,-0.453) 12.385,-0.453 ccw(c11.974,-0.453) v1@12.055,-0.05 ; v1@12.065,0.051 ccw(c12.065,0.48) 12.369,0.177 cw(c12.065,0.48) v1@12.065,0.051
  Top Layer w0.762: P1.1@-21.327,-6.173 cw(c-22.532,-7.378) v1@-20.828,-7.378 ; P1.1@-21.327,-5.298 ccw(c-22.384,-4.241) -20.889,-4.241 ccw(c-19.395,-4.241) -20.452,-5.298 ccw(c-19.395,-4.241) -19.395,-5.735 ccw(c-19.395,-7.23) -20.452,-6.173 ccw(c-19.544,-7.081) -20.828,-7.081 ; P1.1@-21.117,-5.159 ccw(c-21.799,-3.429) v1(-19.939,-3.429) -19.939,-4.785 P1.1@-20.889,-5.735 ; -20.889,-2.093 P1.1@-20.889,-5.735 ; P1.1@-20.837,-5.868 ccw(c-21.357,-4.549) -19.939,-4.549 ; v1(-20.828,-7.62) -20.828,-5.797 P1.1@-20.889,-5.735 ; P1.1@-16.827,-6.173 ccw(c-17.884,-7.23) -17.884,-5.735 ccw(c-17.884,-4.241) -16.827,-5.298 ccw(c-17.884,-4.241) -16.389,-4.241 ccw(c-14.895,-4.241) -15.952,-5.298 ccw(c-14.895,-4.241) -14.895,-5.735 ccw(c-14.895,-7.23) P1.1@-15.952,-6.173 ; P1.1@-16.765,-6.228 cw(c-17.342,-6.985) v1@-16.389,-6.985 ; -16.389,-3.768 P1.1@-16.389,-5.213 ; P1.1@-16.014,-6.228 ccw(c-15.437,-6.985) v1@-16.389,-6.985 ; P1.1@-15.77,-5.735 cw(c-13.016,-5.735) -14.964,-3.788 ; -14.605,-5.715 -14.625,-5.735 P1.1@-16.389,-5.735 ; v1(-14.605,-3.429) P1.1@-16.389,-5.213 ; C30.2@-6.655,5.232 XX1.1@-6.655,8.128 ; P1.1@-20.889,-5.735 -19.05,-5.735 P1.1@-16.389,-5.735 ; v1@-16.389,-6.985 P1.1@-16.389,-5.735 ; P1.1@-16.389,-5.735 P1.1@-16.389,-5.213
  Top Layer w1.016: P2.2@0,-22.352 0,-21.047
  Top Layer w1.524: P2.2@0,-23.114 P2.2@0,-22.098
  Bottom Layer w0.305: v1(-14.605,-3.429) v1(-12.954,-3.429) -11.43,-3.429 -10.16,-2.159 v1(-10.16,-1.524) ; v1(-14.605,-1.27) -13.843,-1.27 v1(-12.954,-0.381) ; v1@-14.497,-3.537 cw(c-14.237,-3.797) -14.237,-3.429 cw(c-14.237,-3.061) v1@-14.497,-3.321 ; v1@-14.497,-1.378 cw(c-14.237,-1.638) -14.237,-1.27 cw(c-14.237,-0.902) v1@-14.497,-1.162 ; -13.462,-5.715 v1(-12.7,-6.477) ; v1@-13.106,-0.381 cw(c-13.474,-0.381) -13.214,-0.641 cw(c-12.954,-0.901) v1@-12.954,-0.533 ; v1@-13.062,-3.537 ccw(c-13.322,-3.797) -13.322,-3.429 ccw(c-13.322,-3.061) v1@-13.062,-3.321 ; v1@-12.852,-6.477 ccw(c-13.22,-6.477) -12.96,-6.217 ccw(c-12.7,-5.957) v1@-12.7,-6.325 ; v1@-12.846,-3.537 cw(c-12.586,-3.797) -12.586,-3.429 cw(c-12.586,-3.061) v1@-12.846,-3.321 ; v1@-10.268,-1.632 cw(c-10.528,-1.892) -10.16,-1.892 cw(c-9.792,-1.892) v1@-10.052,-1.632
  Bottom Layer w0.406: v1(16.256,2.794) v1(20.32,2.794)
  Bottom Layer w0.508: v1(-5.588,-19.05) v1(-2.54,-19.05) ; v1(-4.445,3.429) -4.445,1.524 -3.81,0.889 v1(4.445,0.889) 6.096,0.889 6.985,0 v1(12.065,0) ; v1(-3.81,-16.51) v1(-2.54,-17.78) ; v1(-2.54,6.35) 3.556,6.35 v1(4.191,5.715) v1(5.588,4.318) v1(6.731,3.175) 6.985,2.921 14.986,2.921 v1(15.113,2.794) ; v1(-2.54,13.335) -2.31,13.565 J1.7@-0.738,13.565 ; v1(-2.54,14.605) -1.778,14.605 J1.7@-0.738,13.565 ; v1@-2.504,13.299 cw(c-1.861,12.656) -1.861,13.565 ; -1.332,13.565 cw(c-1.332,12.971) J1.7@-0.912,13.391 ; J1.7@-0.934,13.565 ccw(c-1.407,13.565) -1.073,13.9 ccw(c-0.738,14.234) J1.7@-0.738,13.761 ; J1.7@-0.703,13.797 ccw(c-0.703,14.27) -0.368,13.935 ccw(c-0.034,13.601) J1.7@-0.507,13.601 ; 0.372,14.676 ccw(c-0.446,15.494) v1@0.711,15.494 ; v1(0.762,15.494) 0.762,15.066 J1.7@-0.738,13.565 ; v1(4.445,-7.112) 6.35,-7.112 7.239,-6.223 10.668,-6.223 ; v1(4.445,-5.715) v1(4.445,-1.27) ; v1@6.767,3.211 ccw(c7.467,3.911) 7.467,2.921 ; v1(10.668,-10.795) v1(10.668,-9.779) 10.668,-6.223 ; 10.668,-8.027 cw(c12.091,-8.027) v1@11.085,-7.021 ; v1(11.049,6.35) v1(14.605,6.35) v1(19.05,6.35) ; v1@11.075,-6.941 cw(c11.505,-6.223) 10.668,-6.223 ; 11.255,-6.223 ccw(c11.255,-5.667) v1@11.648,-6.06 ; v1@11.72,-6.06 ccw(c12.113,-5.667) 12.113,-6.223 ; 14.684,2.921 cw(c14.684,2.365) v1@15.077,2.758 ; v1(15.494,-2.794) 15.494,-5.461 14.732,-6.223 10.668,-6.223 ; v1(21.082,-11.557) 21.082,-10.668 v1(21.59,-10.16)
  Bottom Layer w1.016: P2.2@0,-22.575 0,-21.59 v1(2.54,-19.05) 6.604,-14.986 14.351,-14.986 v1(15.875,-16.51) ; P2.2@0.142,-22.225 cw(c2.018,-22.225) 0.691,-20.899
  Bottom Layer w1.524: P2.2@0,-23.114 P2.2@0,-22.098
  other v1: -5.715,-21.59 5.715,-21.59 -5.715,-20.32 2.54,-20.32 5.715,-20.32 5.715,-19.05 14.605,-19.05 2.54,-17.78 14.605,-17.78 15.875,-17.78 -12.7,-16.51 2.54,-16.51 -12.192,-7.112 -21.59,-6.985 -18.161,-5.715 -5.207,-4.826 -3.683,-4.826 -14.605,-4.572 -5.207,-4.064 -3.683,-4.064 -18.161,-3.683 15.494,0 17.526,0 -15.621,0.127 -18.034,0.381 -8.636,0.635 20.066,0.635 -22.352,0.889 1.27,0.889 3.429,0.889 -8.89,3.683 -4.445,4.445 -3.175,4.445 19.05,5.08 -4.445,5.461 -3.175,5.461 -17.78,6.477 -10.16,6.985 15.494,9.144 -20.955,9.525 20.955,10.795 -2.54,10.922 -20.978,11.43 20.193,12.065 -3.175,16.51 17.145,16.51 -3.175,17.78 13.97,17.78 -3.302,19.05 13.97,19.05 -6.35,19.685 2.54,20.32 4.445,20.32 6.35,20.32 -1.905,20.701 -6.985,21.59 6.985,21.59 2.54,22.225 4.445,22.225
KEYX_4: 0.2 #.2 *.2 U6.12 | length 78.8
  Top Layer w0.178: v1(-9.017,-14.605) -8.128,-13.716 -6.096,-13.716 -5.08,-12.7 -5.08,-8.255 -4.645,-7.82 U6.12@-4.645,-6.826 ; v1@-9.017,-14.389 ccw(c-9.017,-13.868) -8.648,-14.236 ccw(c-8.28,-14.605) v1@-8.801,-14.605
  Top Layer w0.2: v1(-18.415,-2.286) v1(-15.494,-2.286) ; v1@-18.27,-2.431 cw(c-17.921,-2.78) -17.921,-2.286 cw(c-17.921,-1.792) v1@-18.27,-2.141 ; v1@-15.627,-2.431 ccw(c-15.977,-2.78) -15.977,-2.286 ccw(c-15.977,-1.792) v1@-15.627,-2.141
  Bottom Layer w0.178: 0.2@-12.473,-2.286 0.2@-12.405,-2.355
  Bottom Layer w0.254: v1@-18.593,-2.286 ccw(c-19.022,-2.286) -18.719,-1.982 ccw(c-18.415,-1.679) v1@-18.415,-2.108 ; -18.461,11.384 cw(c-17.875,10.799) #.2@-17.875,11.627 ; v1@-18.289,-2.412 cw(c-17.986,-2.715) -17.986,-2.286 cw(c-17.986,-1.857) v1@-18.289,-2.16 ; v1@-18.281,-2.286 cw(c-18.281,-2.637) 0.2@-18.033,-2.389 ; 0.2@-18.057,-2.101 cw(c-18.415,-1.846) v1(-18.415,-2.286) ; *.2@-17.749,-8.001 *.2@-17.6,-8.15 ; *.2@-17.61,-7.98 ccw(c-18.732,-6.858) -17.145,-6.858 ; 0.2@-17.61,-2.307 cw(c-18.732,-3.429) -17.145,-3.429 ; #.2@-17.6,11.85 #.2@-12.4,11.85 ; *.2@-17.595,-7.949 -17.595,-8.026 -17.145,-8.026 -17.145,-2.54 -17.33,-2.355 -17.604,-2.355 -17.673,-2.286 v1(-18.415,-2.286) ; #.2@-17.595,11.974 -17.871,11.974 -18.923,10.922 -18.923,-1.778 v1(-18.415,-2.286) ; *.2@-17.43,-8.181 ccw(c-18.118,-7.493) -17.145,-7.493 ; *.2@-17.325,-8.373 cw(c-17.325,-9.399) -16.599,-8.674 ; #.2@-17.167,11.692 cw(c-16.787,11.312) -16.787,11.85 cw(c-16.787,12.388) #.2@-17.167,12.008 ; *.2@-17.018,-8.255 -14.351,-10.922 -14.351,-12.954 -13.716,-13.589 -10.795,-13.589 -9.779,-14.605 v1(-9.017,-14.605) ; v1@-15.62,-2.389 cw(c-15.923,-2.692) -15.494,-2.692 cw(c-15.065,-2.692) v1@-15.368,-2.389 ; v1@-15.391,-2.412 cw(c-15.088,-2.715) -15.088,-2.286 cw(c-15.088,-1.857) v1@-15.391,-2.16 ; -13.081,-2.286 cw(c-13.081,-2.637) 0.2@-12.833,-2.389 ; 0.2@-12.911,-2.431 ccw(c-13.346,-3.012) -13.346,-2.286 ccw(c-13.346,-1.56) 0.2@-12.833,-2.073 ; *.2@-12.881,-8.125 ccw(c-13.31,-8.125) -13.007,-7.822 ccw(c-12.703,-7.518) *.2@-12.703,-7.947 ; #.2@-12.833,11.692 ccw(c-13.213,11.312) -13.213,11.85 ccw(c-13.213,12.388) #.2@-12.833,12.008 ; 0.2@-12.473,-2.286 v1(-15.494,-2.286) -15.494,-5.334 -12.678,-8.15 *.2@-12.4,-8.15 ; v1@-9.143,-14.731 ccw(c-9.446,-15.034) -9.446,-14.605 ccw(c-9.446,-14.176) v1@-9.143,-14.479